# Altium PCB NBP-28 Pin_Swap_Example.PcbDoc (part 2 of 4)
Units mil, origin at the board's own origin, x right, y up, seen from the top; angles counter-clockwise.
Board outline 2716.54 x 4967.15 mil, 10 copper layers (Top Layer, Mid-Layer 1, VCC1V2, Mid-Layer 2, VCC, GND, MidLayer4, VCCINT, Mid-Layer 3, Bottom Layer), stack 81 mil thick; 254 components, 445 nets, 1667 pads, 770 vias.
Unrouted connection lines stored in the file: 611.
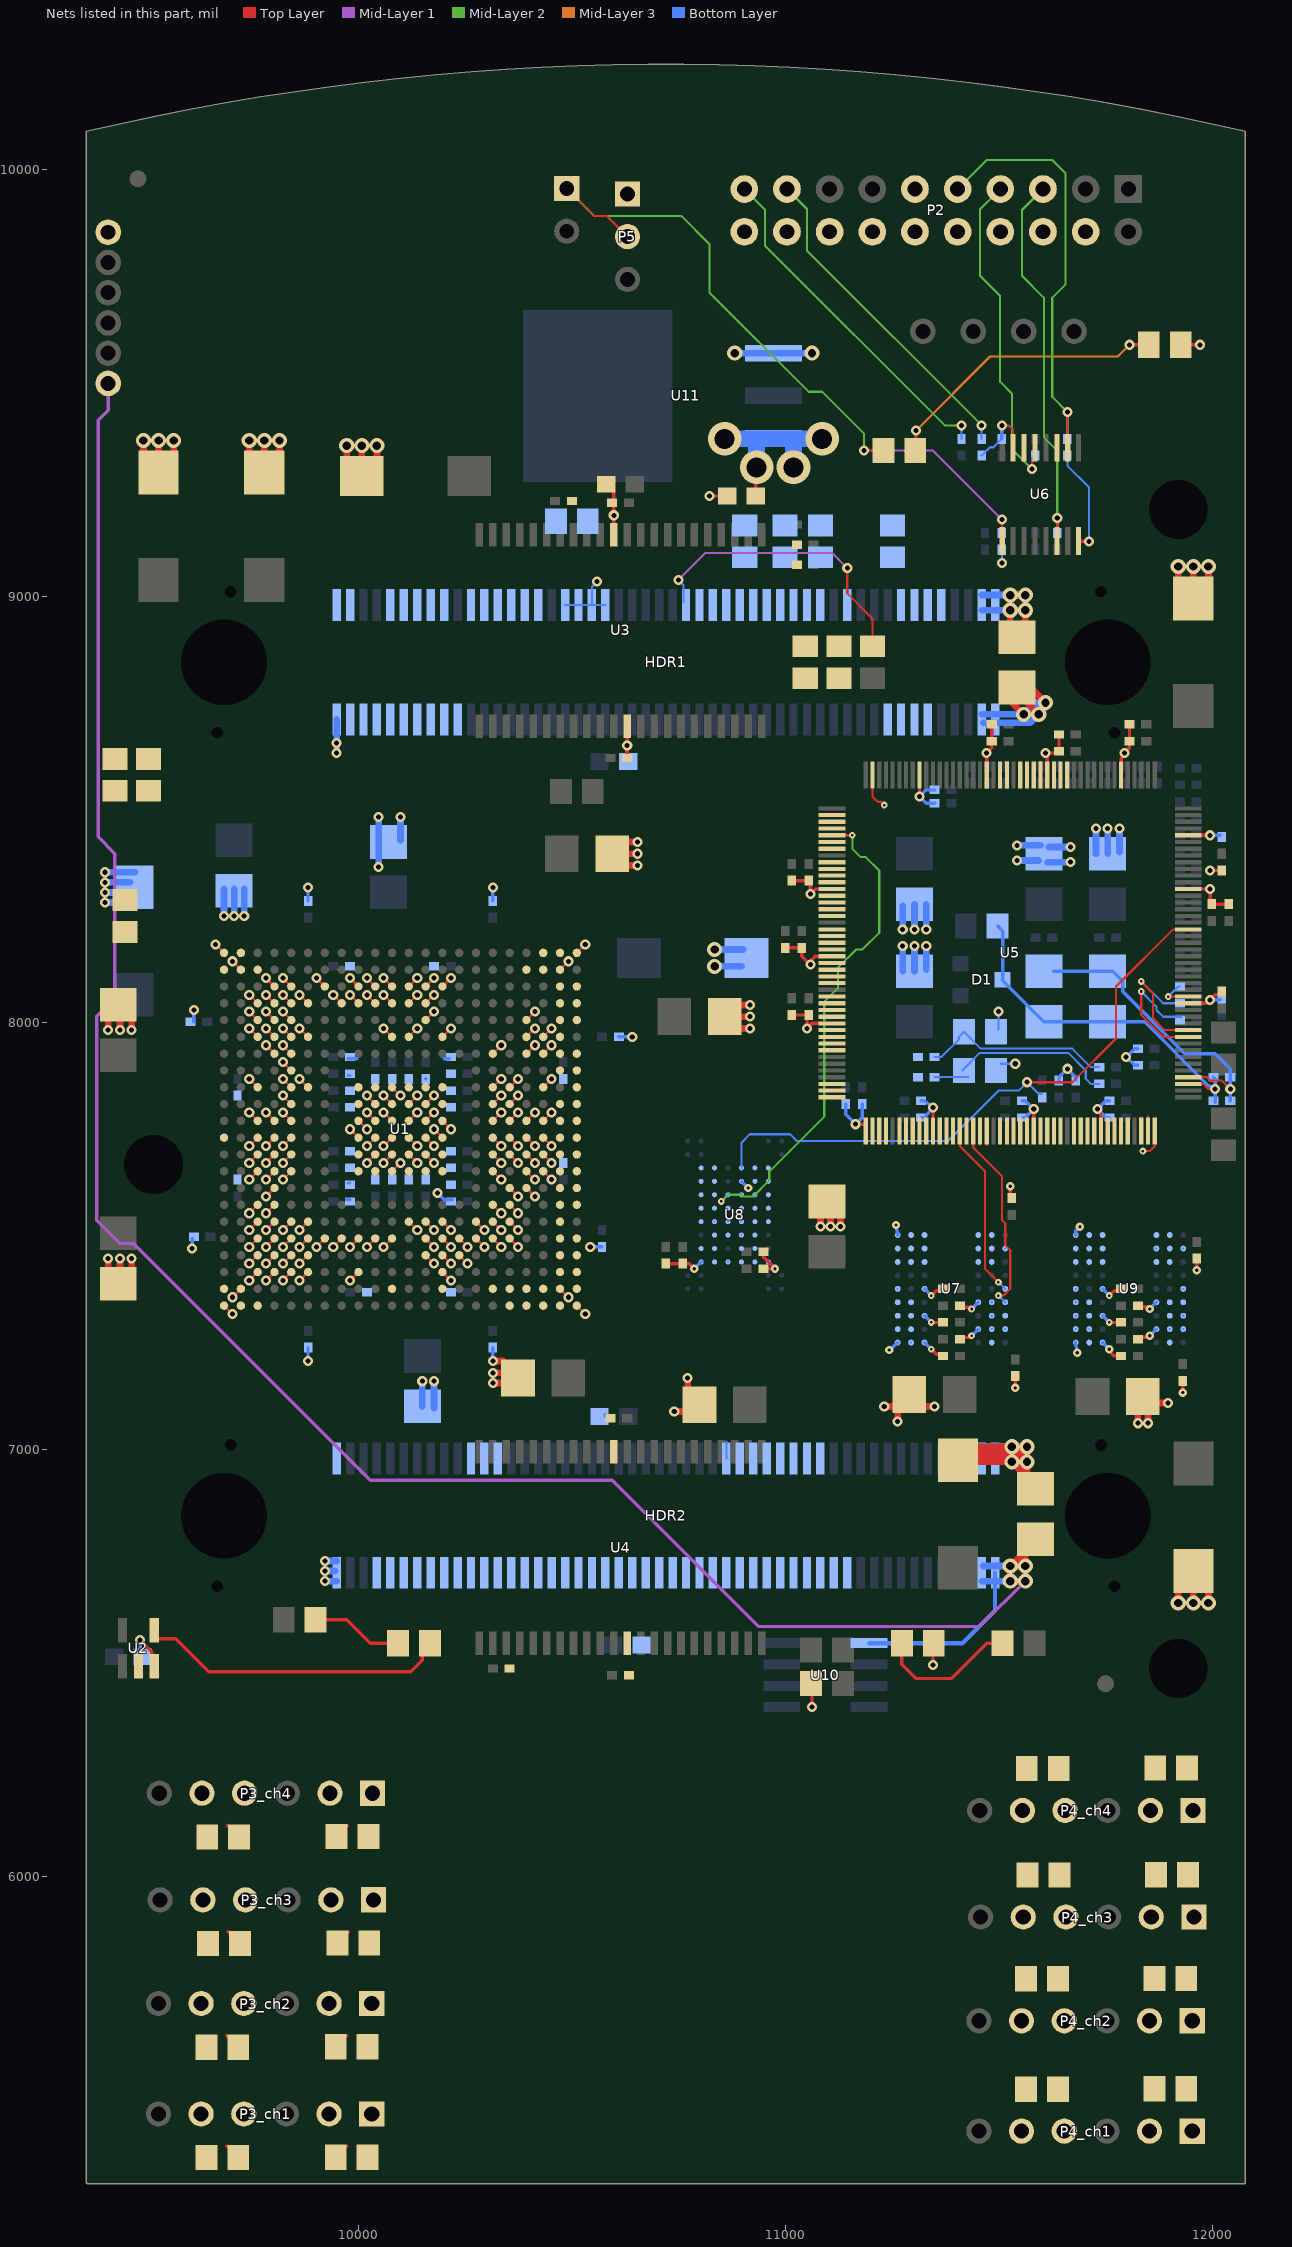
[diagram p9: the nets of this part, all layers, seen from the top]

## Part data
C1: library part CAP-NP-220nF-10V-0603, "Capacitor", Design Item Id=CAP-NP-220nF-10V-0603
C2 C3 C16 C17 C30 C31 C32: library part CAP-P-10uF-16V-MCCT-B, "Polar Capacitor", Design Item Id=CAP-P-10uF-16V-MCCT-B
C4 C5 C12 C13 C14 C15 C18 C19 C20 C21 C33 C34 C35 C36 C41 C42: library part CAP-NP-0.1uF-16V-0402, "Capacitor", Design Item Id=CAP-NP-0.1uF-16V-0402
C6 C7 C8 C9 C10 C11 C22 C23 C24 C25 C26 C27 C28 C29 C37 C38 C39 C40 C43 C44 C45 C46 C47 C48: library part CAP-NP-10nF-16V-0402, "Capacitor", Design Item Id=CAP-NP-10nF-16V-0402
C49 C50 C64 C65 C66 C67 C88 C89 C102 C110 C111 C123 C125 C126 C127 C128 C129 C130 C131 C132 C133: "Polar Capacitor"
  C49 C50 C64 C65 C66 C67 C88 C89 C102 C110 C111 C123 C125: Design Item Id=CAP-P-10uF-16V-MCCT-B
  C126 C127 C128 C129 C130 C131 C132 C133: Design Item Id=CAP-P-220uF-4V-MCCT-D
C51 C52 C53 C54 C55 C56 C57 C58 C59 C60 C61 C62 C63 C68 C69 C70 C71 C72 C73 C74 C75 C76 C77 C78 C79 C80 C81 C82 C83 C84 C85 C86 C87 C90 C91 C92 C93 C94 C95 C96 C97 C98 C99 C100 C101 C103 C104 C105 C106 C107 C108 C109 C112 C113 C114 C115 C116 C117 C118 C119 C120 C121 C122 C124: "Capacitor"
  C51 C52 C55 C56 C124: Design Item Id=CAP-NP-220nF-10V-0603
  C53 C54 C57 C58 C61 C78 C79 C80 C81 C82 C83 C84 C85 C86 C87 C96 C97 C98 C99 C100 C101 C104 C105 C106 C107 C108 C109 C114 C115 C116 C117 C119 C120 C121: Design Item Id=CAP-NP-10nF-16V-0402
  C59 C60 C62 C63 C68 C69 C70 C71 C72 C73 C74 C75 C76 C77 C90 C91 C92 C93 C94 C95 C103 C112 C113 C118 C122: Design Item Id=CAP-NP-0.1uF-16V-0402
D1: "Schottky Barrier Double Diode", Design Item Id=DIO-SCHOTTKY-1S-SOT23
HDR1 HDR2: library part CON-DOCKSTAT-M-0.8mm, "Board-to-Board, Docking Station, 0.80mm (.031\") Pitch, Shielded Receptacle, Vertical, Ultra Low Profile, SMT", Design Item Id=CON-DOCKSTAT-M-0.8mm
LED1: library part LED-RED-HSMHC170, "Typical GREEN SMD LED Agilent make", Design Item Id=LED-RED-HSMHC170
LED2: library part LED-GRN-HSMHC170, "Typical GREEN SMD LED Agilent make", Design Item Id=LED-GRN-HSMHC170
LED3: "Typical GREEN SMD LED Agilent make", Design Item Id=LED-RED-HSMHC170
P1: "Header, 2-Pin", Design Item Id=CON-HDRSTR-2x1-2.54mm
P2: "10x2 IDC Male PCB Box Header", Design Item Id=CON-IDCHDRSTRBOX-M-20
P3_ch1 P3_ch2 P3_ch3 P3_ch4 P4_ch1 P4_ch2 P4_ch3 P4_ch4: "Header, 6-Pin", LatestRevisionDate=17-Jul-2002, LatestRevisionNote="Re-released for DXP Platform.", Publisher="Altium Limited"
P5: "Header, 3-Pin", LatestRevisionDate=17-Jul-2002, LatestRevisionNote="Re-released for DXP Platform.", Publisher="Altium Limited"
R1 R15 R17 R18 R19: library part RES-4K7-0402, "Resistor", Design Item Id=RES-4K7-0402
R2 R3 R4 R6 R7 R8 R9 R10 R11 R12 R13 R14 R16: library part RES-100R-0805, "Resistor", Design Item Id=RES-100R-0805
R5: library part RES-270R-1%-0805, "Resistor", Design Item Id=RES-270R-1%-0805
R20 R21 R22 R23 R24 R25 R26 R27 R28 R29 R30 R31 R32 R33 R34 R35 R36 R37 R38 R39 R40 R41 R42 R43 R44 R45 R46 R47 R48 R49 R50 R51 R52 R53 R54 R55 R56 R57 R58 R59 R60 R61 R62 R63 R64 R65 R66 R67 R68_ch1 R68_ch2 R68_ch3 R68_ch4 R69_ch1 R69_ch2 R69_ch3 R69_ch4 R70_ch1 R70_ch2 R70_ch3 R70_ch4 R71_ch1 R71_ch2 R71_ch3 R71_ch4: "Resistor"
  R20 R21 R22 R23 R24 R25 R26 R27 R28 R29 R30 R31 R32 R33 R34 R35 R36 R39 R40 R41 R42 R43 R44 R45 R48 R49 R50 R51 R52 R53 R54 R55 R56 R57 R60 R61 R62 R63 R66 R67: Design Item Id=RES-4K7-0402
  R37 R46 R58 R64 R65 R68_ch1 R68_ch2 R68_ch3 R68_ch4 R69_ch1 R69_ch2 R69_ch3 R69_ch4 R70_ch1 R70_ch2 R70_ch3 R70_ch4 R71_ch1 R71_ch2 R71_ch3 R71_ch4: Design Item Id=RES-270R-1%-0805
  R38 R47: Design Item Id=RES-10M-0805
  R59: Design Item Id=RES-100R-0805
TP1 TP2: library part TestPin, Design Item Id=TestPin
U1: "Spartan-3 1.2V FPGA, 333 User I/Os, 456-ball FBGA, Standard Performance, Commercial Grade", Design Item Id=XC3S1000-4FG456C
U3 U4: "256Kx16Bit SRAM TSOP44", Design Item Id=MEM-SRAM-256Kx16-TSOP44
U5: "32-Bit ARM720T-Based BlueStreak MCU with 8KB Cache, MMU, Color LCD controller, 32KB SRAM, 176-Pin LQFP", Design Item Id=LH79520N0M000
U6: "Quad 2-Input Multiplexer", Design Item Id=74LCX157-TSOP16
U7 U9: "256Mb Synchronous High-Speed CMOS DRAM, 16Mb x 16Bit x 4 Banks, 54-Ball FPGA, Commercial", Design Item Id=MEM-SDRAM-16Mx16-BGA54
U8: "64 Mb (4 M x 16) CMOS 3.0 Volt, Uniform Sector Flash Memory with VersatileI/O Control, 63-ball FBGA, Industrial Grade", Design Item Id=MEM-FLASH-P-4Mx16-BGA63
U10: "Low Current 3-Terminal Adjustable Positive Voltage Regulator", Design Item Id=VRG-100mA-1.2V-37V-4%-75102
U11: "5A Low Dropout Positive Regulators", Design Item Id=LM1084IS-ADJ
TP3 TP4 TP5 TP6 TP7 TP8 TP9 TP10: Design Item Id=TestPin
U2: Design Item Id=SN74LVC1G04DBV

## Free pads (board coordinates)
  round 39.37 smd paste-39.37 mask+78.74: FID(9482.69,9978.67) FID(11750.41,6451.11)
  round 39.37 smd far side paste-39.37 mask+78.74: FID(9482.69,9978.67) FID(11750.41,6451.11)
  round 125.98 hole 137.8 unplated mask+3.94: LP(9519.16,7668.29) LP(11920.74,6487.18) LP(11920.74,9203.72)

## Via types
v1: diameter 23.62, hole 11.81, Top Layer to Bottom Layer, 495 vias
v2: diameter 78.74, hole 47.24, Top Layer to Bottom Layer, 101 vias
v3: diameter 15.75, hole 5.91, Top Layer to Bottom Layer, 92 vias
v4: diameter 35.43, hole 19.68, Top Layer to Bottom Layer, 59 vias
v5: diameter 19.68, hole 7.87, Top Layer to Bottom Layer, 23 vias

## Nets (pads, with @x,y where several pads share a name; then routed paths per layer and width w, separated by ;. In a path a pad name is that pad's centre, name@x,y a point inside that pad or via, vN(x,y) a via of type N, cw(c..) or ccw(c..) an arc to the next point about the centre after c; other vN are vias at no path point)
+5V: C123.1 C124.1 C125.1 HDR1.97 HDR1.99 HDR2.97 HDR2.99 TP8.1 U10.1 U11.3 | length 6499.5
  Top Layer w7.87: C124.1@10930.58,9235.22 v2@10930.58,9300.18
  Top Layer w15.75: C123.1@11530.97,8750.96 v4(11558.53,8723.41) ; C123.1@11546.72,8790.33 11546.72,8770.65 v4(11593.96,8723.41) ; C123.1@11558.53,8794.27 11566.41,8794.27 v4(11609.71,8750.96) ; C125.1@11562.47,6786.4 C125.1@11562.47,6762.78 ; v4(11527.04,6727.34) v4(11562.47,6727.34) ; v4(11527.04,6727.34) v4(11527.04,6691.91) v4(11562.47,6691.91) v4(11562.47,6727.34) ; v4(11527.04,6727.34) C125.1@11562.47,6762.78 ; v4(11562.47,6727.34) C125.1@11562.47,6762.78
  Mid-Layer 1 w7.87: TP8.1@9412.86,9499 9412.86,9436 9389.24,9412.38 9389.24,8436 9428.61,8396.63 9428.61,8058.05 9386.36,8015.81 9386.36,7537.3 9440.42,7483.25 9471.92,7483.25 10027.04,6928.13 10593.96,6928.13 10936.48,6585.61 11456.17,6585.61 v4(11562.47,6691.91)
  Bottom Layer w10: U10.1@11196.33,6546.44 11415,6546.44 11491.6,6623.04 11491.6,6691.91 HDR2.99@11491.6,6711.59
  Bottom Layer w15.75: HDR2.97@11460.11,6691.91 11491.6,6691.91 v4(11527.04,6691.91) v4(11562.47,6691.91) ; HDR1.97@11460.11,8723.41 v4(11558.53,8723.41) ; HDR2.97@11464.04,6727.34 v4(11527.04,6727.34) v4(11562.47,6727.34) ; HDR1.97@11464.04,8703.72 11574.28,8703.72 v4(11593.96,8723.41) ; v4@11586.09,8735.22 v4@11601.84,8750.96 ; v4(11558.53,8723.41) v4(11593.96,8723.41) ; v4(11558.53,8723.41) 11586.09,8750.96 v4@11601.84,8750.96 ; v4(11593.96,8723.41) 11609.71,8739.15 v4(11609.71,8750.96) v4@11601.84,8750.96
  Bottom Layer w39.37: v2(10857.74,9369.07) U11.3@10932.55,9369.07 ; v2(10932.55,9302.15) U11.3@10932.55,9369.07 ; v2(11019.16,9302.15) U11.3@11019.16,9369.07 ; v2(11086.09,9369.07) U11.3@11019.16,9369.07 ; U11.3@10932.55,9369.07 U11.3@11019.16,9369.07
A0: U1.F19 U5.32 U7.H7 U9.H7 | length 30
  Top Layer w5: U1.F19@10393.18,7967.5 v1(10412.86,7987.19)
  Bottom Layer w5: U9.H7@11867.43,7471.44 U9.H7@11869.56,7471.44
A1: U1.R18 U5.31 U7.H8 U8.G2 U9.H8 | length 27.8
  Top Layer w5: U1.R18@10353.81,7613.17 v1(10373.49,7593.48)
A2: U1.T22 U5.30 U7.J8 U8.F2 U9.J8
A3: U1.R21 U5.29 U7.J7 U8.E2 U9.J7
A4: U1.M22 U5.27 U7.J3 U8.C2 U9.J3
A5: U1.N21 U5.26 U7.J2 U8.D2 U9.J2
A6: U1.L17 U5.25 U7.H3 U8.F3 U9.H3 | length 27.8
  Top Layer w5: U1.L17@10314.44,7770.65 v1(10334.12,7790.34)
A7: U1.N22 U5.24 U7.H2 U8.E3 U9.H2
A8: U1.J17 U5.22 U7.H1 U8.C3 U9.H1 | length 27.8
  Top Layer w5: U1.J17@10314.44,7849.39 v1(10334.12,7869.08)
A9: U1.K17 U5.21 U7.G3 U8.D6 U9.G3 | length 27.8
  Top Layer w5: U1.K17@10314.44,7810.02 v1(10334.12,7829.71)
A10: U1.P21 U5.20 U7.H9 U8.C6 U9.H9 | length 0
A11: U1.P17 U5.19 U7.G2 U8.E6 U9.G2 | length 27.8
  Top Layer w5: U1.P17@10314.44,7652.54 v1(10334.12,7632.85)
A12: U1.T17 U5.17 U7.G1 U8.F6 U9.G1 | length 27.8
  Top Layer w5: U1.T17@10314.44,7573.8 v1(10334.12,7554.11)
A13: U1.N17 U5.16 U7.G7 U8.D7 U9.G7 | length 27.8
  Top Layer w5: U1.N17@10314.44,7691.91 v1(10334.12,7672.22)
A14: U1.M17 U5.15 U7.G8 U8.C7 U9.G8 | length 27.8
  Top Layer w5: U1.M17@10314.44,7731.28 v1(10334.12,7711.59)
A15: U1.T18 U5.14 U8.E7 | length 27.8
  Top Layer w5: U1.T18@10353.81,7573.8 v1(10373.49,7554.11)
A16: U1.U18 U5.12 U8.F7 | length 27.8
  Top Layer w5: U1.U18@10353.81,7534.43 v1(10373.49,7514.74)
A17: U1.U17 U5.11 U8.G7 | length 27.8
  Top Layer w5: U1.U17@10314.44,7534.43 v1(10334.12,7514.74)
A18: U1.P22 U5.10 U8.D3
A19: U1.R22 U5.9 U8.E4
A20: U1.T21 U5.7 U8.F5
A21: U1.G17 U5.6 U8.F4 | length 27.8
  Top Layer w5: U1.G17@10314.44,7928.13 v1(10334.12,7947.82)
A22: U1.F21 U5.5 U8.E5 | length 1162.9
  Top Layer w5: U5.5@11109.71,8439.94 v3(11156.96,8439.94)
  Mid-Layer 2 w5: v3(10849.87,7581.67) 10865.62,7597.42 10897.11,7597.42 10901.05,7593.48 10924.67,7593.48 10962.23,7631.04 10962.23,7651.45 11091.21,7780.43 11091.21,8049.6 11123.02,8081.41 11123.02,8129.48 11165.76,8172.22 11180.58,8172.22 11219.95,8211.59 11219.95,8357.26 11188.45,8388.76 11176.64,8388.76 11156.96,8408.44 v3(11156.96,8439.94)
  Bottom Layer w5: v3(10849.87,7581.67) U8.E5@10865.62,7597.42
A23: U1.E22 U5.4
A24: U1.E21 U5.3
A25: U1.D22 U5.2
AUDIO_SPI_CSN: HDR1.11 U1.C11 | length 27.8
  Top Layer w5: v1(10058.53,8105.3) U1.C11@10078.22,8085.61
BLUE0: HDR1.14 U1.D5 | length 27.8
  Top Layer w5: v1(9822.31,8065.93) U1.D5@9842,8046.24
BLUE1: HDR1.16 U1.C4 | length 27.8
  Top Layer w5: v1(9782.94,8105.3) U1.C4@9802.63,8085.61
BOC_CTS: HDR1.13 U1.D12 | length 27.8
  Top Layer w5: U1.D12@10117.59,8046.24 v1(10137.27,8065.93)
BOC_RTS: HDR1.17 U1.C13 | length 27.8
  Top Layer w5: U1.C13@10156.96,8085.61 v1(10176.64,8105.3)
BOC_RX: HDR1.19 U1.D13 | length 27.8
  Top Layer w5: U1.D13@10156.96,8046.24 v1(10176.64,8065.93)
BOC_TX: HDR1.15 U1.E13 | length 27.8
  Top Layer w5: U1.E13@10156.96,8006.87 v1(10176.64,8026.56)
BUZZER: HDR2.24 U1.W14 | length 27.8
  Top Layer w5: U1.W14@10196.33,7455.69 v1(10216.01,7436)
CAN_RXD: HDR1.4 U1.C7 | length 27.8
  Top Layer w5: v1(9901.05,8105.3) U1.C7@9920.74,8085.61
CAN_TXD: HDR1.2 U1.D8 | length 27.8
  Top Layer w5: v1(9940.42,8065.93) U1.D8@9960.11,8046.24
CLK_RTC: R44.2 U1.G19 | length 27.8
  Top Layer w5: U1.G19@10393.18,7928.13 v1(10412.86,7947.82)
CLKIN: R36.2 U1.G20 | length 27.8
  Top Layer w5: U1.G20@10432.55,7928.13 v1(10452.23,7947.82)
CLKOUT: U1.C12 U5.156 | length 27.8
  Top Layer w5: U1.C12@10117.59,8085.61 v1(10137.27,8105.3)
D0: U1.AA17 U5.87 U8.G3 U9.A8 | length 33.1
  Top Layer w5: U5.87@11849.87,7747.03 11849.87,7780.13
D1: U1.Y21 U5.86 U8.K3 U9.B9 | length 31.5
  Top Layer w5: U5.86@11834.12,7747.03 U5.86@11834.12,7778.52
D2: U1.U21 U5.84 U8.G4 U9.B8 | length 0
D3: U1.Y22 U5.83 U8.K4 U9.C9 | length 0
D4: U1.W21 U5.82 U8.K5 U9.C8 | length 0
D5: U1.U16 U5.81 U8.G5 U9.D9 | length 27.8
  Top Layer w5: U1.U16@10275.07,7534.43 v1(10294.75,7514.74)
D6: U1.W22 U5.79 U8.K6 U9.D8
D7: U1.V21 U5.78 U8.G6 U9.E9 | length 0
D8: U1.V18 U5.77 U8.H3 U9.E1 | length 27.8
  Top Layer w5: U1.V18@10353.81,7495.06 v1(10373.49,7475.37)
D9: U1.AA20 U5.76 U8.J3 U9.D2
D10: U1.V22 U5.74 U8.H4 U9.D1 | length 0
D11: U1.AB20 U5.73 U8.J4 U9.C2
D12: U1.AB18 U5.72 U8.H5 U9.C1 | length 0
D13: U1.AA19 U5.71 U8.J6 U9.B2 | length 0
D14: U1.AA18 U5.69 U8.H6 U9.B1 | length 0
D15: U1.AB19 U5.68 U8.J7 U9.A2
D16: U1.V7 U5.67 U7.A8 | length 27.8
  Top Layer w5: v1(9901.05,7475.37) U1.V7@9920.74,7495.06
D17: U1.V9 U5.66 U7.B9 | length 27.8
  Top Layer w5: v1(9979.79,7475.37) U1.V9@9999.48,7495.06
D18: U1.V10 U5.65 U7.B8 | length 27.8
  Top Layer w5: v1(10019.16,7475.37) U1.V10@10038.85,7495.06
D19: U1.V6 U5.63 U7.C9 | length 60.9
  Top Layer w5: v1(9861.68,7475.37) U1.V6@9881.37,7495.06 ; 11471.92,7713.93 U5.63@11471.92,7747.03
D20: U1.V11 U5.62 U7.C8 | length 59.3
  Top Layer w5: v1(10058.53,7475.37) U1.V11@10078.22,7495.06 ; 11456.17,7715.53 U5.62@11456.17,7747.03
D21: U1.U6 U5.61 U7.D9 | length 490.1
  Top Layer w5: v1(9861.68,7514.74) U1.U6@9881.37,7534.43 ; U5.61@11440.42,7747.03 11440.42,7708.38 11507.35,7641.45 11507.35,7538.37 11515.22,7530.49 11515.22,7479.31 11527.04,7467.5 11527.04,7376.95 11511.29,7361.2 v3(11499.48,7361.2)
  Bottom Layer w5: v3(11499.48,7361.2) U7.D9@11515.22,7345.45
D22: U1.V8 U5.60 U7.D8 | length 27.8
  Top Layer w5: v1(9940.42,7475.37) U1.V8@9960.11,7495.06
D23: U1.V5 U5.59 U7.E9 | length 441.9
  Top Layer w5: v1(9822.31,7475.37) U1.V5@9842,7495.06 ; U5.59@11408.93,7747.03 11408.93,7711.59 11467.98,7652.54 11467.98,7424.19 v3(11499.48,7392.7)
  Bottom Layer w5: v3(11499.48,7392.7) U7.E9@11515.22,7376.95
D24: U1.U13 U5.58 U7.E1 | length 27.8
  Top Layer w5: U1.U13@10156.96,7534.43 v1(10176.64,7514.74)
D25: U1.U14 U5.57 U7.D2 | length 27.8
  Top Layer w5: U1.U14@10196.33,7534.43 v1(10216.01,7514.74)
D26: U1.V17 U5.56 U7.D1 | length 27.8
  Top Layer w5: U1.V17@10314.44,7495.06 v1(10334.12,7475.37)
D27: U1.V16 U5.54 U7.C2 | length 27.8
  Top Layer w5: U1.V16@10275.07,7495.06 v1(10294.75,7475.37)
D28: U1.V15 U5.53 U7.C1 | length 27.8
  Top Layer w5: U1.V15@10235.7,7495.06 v1(10255.38,7475.37)
D29: U1.V14 U5.52 U7.B2 | length 27.8
  Top Layer w5: U1.V14@10196.33,7495.06 v1(10216.01,7475.37)
D30: U1.V13 U5.51 U7.B1 | length 31.1
  Top Layer w5: U1.V13@10156.96,7495.06 v1(10176.64,7475.37) ; U5.51@11280.64,7744.72 U5.51@11282.94,7747.03
D31: U1.U12 U5.50 U7.A2 | length 27.8
  Top Layer w5: U1.U12@10117.59,7534.43 v1(10137.27,7514.74)
DEBUG_TCK: P2.9 R63.2 U6.10 | length 1026.9
  Top Layer w5: U6.10@11660.89,9349.39 v1(11660.89,9432.07)
  Mid-Layer 2 w5: P2.9@11403.81,9954.51 11471.92,10022.62 11625.46,10022.62 11656.96,9991.12 11656.96,9731.28 11625.46,9699.78 11625.46,9467.5 v1(11660.89,9432.07)
  Bottom Layer w5: R63.2@11660.89,9369.07 v1(11660.89,9432.07)
DEBUG_TDI: P2.5 R61.2 U6.6 | length 915.7
  Top Layer w5: U6.6@11637.27,9128.92 v1(11637.27,9184.04)
  Mid-Layer 2 w5: P2.5@11603.81,9954.51 11554.59,9905.3 11554.59,9750.96 11605.78,9699.78 11605.78,9373.01 11637.27,9341.52 v1(11637.27,9184.04)
  Bottom Layer w5: R61.2@11637.27,9148.6 v1(11637.27,9184.04)
DEBUG_TMS: P2.7 R62.2 U6.13 | length 768.8
  Top Layer w5: v1(11578.22,9298.21) 11578.22,9313.96 U6.13@11586.09,9321.83
  Mid-Layer 2 w5: P2.7@11495.18,9945.88 11456.17,9906.87 11456.17,9750.96 11503.41,9703.72 11503.41,9502.93 11530.97,9475.37 11530.97,9345.45 v1(11578.22,9298.21)
  Bottom Layer w5: v1(11578.22,9298.21) R62.2@11578.22,9325.77
DEOT0: U1.L18 U5.148 | length 27.8
  Top Layer w5: U1.L18@10353.81,7770.65 v1(10373.49,7790.34)
DIFF_RX_ch1_N: P3_ch1.5 P4_ch1.1 R69_ch1.2 R71_ch1.1
DIFF_RX_ch1_P: P3_ch1.4 P4_ch1.2 R69_ch1.1 R71_ch1.2 | length 38.7
  Top Layer w7.87: 9690.46,5368.14 R71_ch1.2@9717.86,5340.74
DIFF_RX_ch2_N: P3_ch2.5 P4_ch2.1 R69_ch2.2 R71_ch2.1
DIFF_RX_ch2_P: P3_ch2.4 P4_ch2.2 R69_ch2.1 R71_ch2.2 | length 38.7
  Top Layer w7.87: 9690.46,5626.94 R71_ch2.2@9717.86,5599.54
DIFF_RX_ch3_N: P3_ch3.5 P4_ch3.1 R69_ch3.2 R71_ch3.1
DIFF_RX_ch3_P: P3_ch3.4 P4_ch3.2 R69_ch3.1 R71_ch3.2 | length 38.7
  Top Layer w7.87: 9694.39,5869.98 R71_ch3.2@9721.79,5842.58
DIFF_RX_ch4_N: P3_ch4.5 P4_ch4.1 R69_ch4.2 R71_ch4.1
DIFF_RX_ch4_P: P3_ch4.4 P4_ch4.2 R69_ch4.1 R71_ch4.2 | length 38.7
  Top Layer w7.87: 9692.43,6119.92 R71_ch4.2@9719.83,6092.52
DIFF_TX_ch1_N: P3_ch1.2 P4_ch1.5 R68_ch1.1 R70_ch1.1 | length 36.3
  Top Layer w7.87: R70_ch1.1@9946.13,5341.73 9971.82,5367.42
DIFF_TX_ch1_P: P3_ch1.1 P4_ch1.4 R68_ch1.2 R70_ch1.2
DIFF_TX_ch2_N: P3_ch2.2 P4_ch2.5 R68_ch2.1 R70_ch2.1 | length 36.3
  Top Layer w7.87: R70_ch2.1@9946.13,5600.52 9971.82,5626.22
DIFF_TX_ch2_P: P3_ch2.1 P4_ch2.4 R68_ch2.2 R70_ch2.2
DIFF_TX_ch3_N: P3_ch3.2 P4_ch3.5 R68_ch3.1 R70_ch3.1 | length 36.3
  Top Layer w7.87: R70_ch3.1@9950.06,5843.57 9975.76,5869.26
DIFF_TX_ch3_P: P3_ch3.1 P4_ch3.4 R68_ch3.2 R70_ch3.2
DIFF_TX_ch4_N: P3_ch4.2 P4_ch4.5 R68_ch4.1 R70_ch4.1 | length 36.3
  Top Layer w7.87: R70_ch4.1@9948.09,6093.5 9973.79,6119.2
DIFF_TX_ch4_P: P3_ch4.1 P4_ch4.4 R68_ch4.2 R70_ch4.2
DREQ0: U1.M18 U5.146 | length 27.8
  Top Layer w5: U1.M18@10353.81,7731.28 v1(10373.49,7711.59)
FLASH_BUSY: R20.1 U5.114 U8.C4 | length 1444.8
  Top Layer w5: v1(11566.41,7861.2) 11672.7,7861.2 11775.07,7963.56 11775.07,8085.61 11908.93,8219.47 U5.114@11944.36,8219.47
  Bottom Layer w5: U8.C4@10897.11,7660.41 10897.11,7719.47 10916.8,7739.15 11011.29,7739.15 11027.04,7723.41 11381.37,7723.41 11499.48,7841.52 11546.72,7841.52 v1(11566.41,7861.2) 11593.96,7833.64 R20.1@11601.84,7833.64
FPGA_AUX0: R14.1 U1.B3
FPGA_AUX0_R: HDR1.86 R14.2
FPGA_AUX1: HDR1.88 U1.F12 | length 27.8
  Top Layer w5: U1.F12@10117.59,7967.5 v1(10137.27,7987.19)
FPGA_AUX2: HDR1.90 U1.F14 | length 27.8
  Top Layer w5: U1.F14@10196.33,7967.5 v1(10216.01,7987.19)
FPGA_AUX3: HDR1.92 U1.F11 | length 27.8
  Top Layer w5: v1(10058.53,7987.19) U1.F11@10078.22,7967.5
FPGA_CCLK: R3.2 U1.AA22
FPGA_CCLK_R: HDR1.66 R3.1
FPGA_CLK: HDR2.2 U1.AA11
FPGA_CLK_1: HDR1.30 U1.F3 | length 27.8
  Top Layer w5: v1(9743.57,7987.19) U1.F3@9763.26,7967.5
FPGA_CLK_2: HDR1.32 U1.G4 | length 27.8
  Top Layer w5: v1(9782.94,7947.82) U1.G4@9802.63,7928.13
FPGA_DIN: HDR1.64 U1.AA14
FPGA_DONE: R4.2 R15.1 U1.AB21 U2.2
FPGA_DONE_R: HDR1.74 R4.1
FPGA_INIT: HDR1.68 R18.1 R19.1
FPGA_M0: R8.2 U1.AB2
FPGA_M0_R: HDR1.60 R8.1
FPGA_M1: R9.2 U1.AA1
FPGA_M1_R: HDR1.58 R9.1
FPGA_M2: R10.2 U1.AB3
FPGA_M2_R: HDR1.56 R10.1
FPGA_PROGRAM_R: HDR1.62 R7.1 R17.1
FPGA_PROGRAMP: R7.2 U1.A2
FPGA_TCK: HDR1.72 R12.1 U6.11
FPGA_TCKP: R12.2 U1.A21
FPGA_TDI: HDR1.78 R11.1
FPGA_TDIP: R11.2 U1.B1
FPGA_TDO: HDR1.54 R6.2 | length 702.1
  Top Layer w5: v1(11145.15,9065.92) 11145.15,9006.87 11204.2,8947.81 R6.2@11204.2,8882.85
  Mid-Layer 1 w5: v1(10749.3,9038.31) 10812.34,9101.36 11109.71,9101.36 v1(11145.15,9065.92)
  Bottom Layer w5: v1(10749.3,9038.31) 10761.3,9026.31 HDR1.54@10761.3,8985.31
FPGA_TMS: HDR1.70 R13.1 U6.14
FPGA_TMSP: R13.2 U1.A20
GND: C1.1 C2.2 C3.2 C4.2 C5.2 C6.2 C7.2 C8.2 C9.2 C10.2 C11.2 C12.2 C13.2 C14.2 C15.2 C16.2 C17.2 C18.2 C19.2 C20.2 C21.2 C22.2 C23.2 C24.2 C25.2 C26.2 C27.2 C28.2 C29.2 C30.2 C31.2 C32.2 C33.2 C34.2 C35.2 C36.2 C37.2 C38.2 C39.2 C40.2 C41.2 C42.2 C43.2 C44.2 C45.2 C46.2 C47.2 C48.2 C49.2 C50.2 C51.2 C52.2 C53.2 C54.2 C55.2 C56.2 C57.2 C58.2 C62.2 C66.2 C67.2 C68.2 C69.2 C70.2 C71.2 C72.2 C73.2 C74.2 C75.2 C76.2 C77.2 C78.2 C79.2 C80.2 C81.2 C82.2 C83.2 C84.2 C85.2 C86.2 C87.2 C88.2 C89.2 C90.2 C91.2 C92.2 C93.2 C94.2 C95.2 C96.2 C97.2 C98.2 C99.2 C100.2 C101.2 C102.2 C103.2 C104.2 C105.2 C106.2 C107.2 C108.2 C109.2 C110.2 C111.2 C112.2 C113.2 C114.2 C115.2 C116.2 C117.2 C118.2 C119.2 C120.2 C121.2 C122.2 C123.2 C124.2 C125.2 C126.2 C127.2 C128.2 C129.2 C130.2 C131.2 C132.2 C133.2 HDR1.1 HDR1.36 HDR1.38 HDR1.40 HDR1.42 HDR1.98 HDR1.100 HDR2.1 HDR2.98 HDR2.100 LED1.2 LED3.2 P2.4 P2.6 P2.8 P2.10 P2.11 P2.12 P2.14 P2.16 P2.18 P2.20 P5.1 R37.1 R46.1 R60.2 R63.1 R65.2 R66.1 TP10.1 U1.A1 U1.A22 U1.AA2 U1.AA21 U1.AB1 U1.AB22 U1.B2 U1.B21 U1.C9 U1.C14 U1.J3 U1.J9 U1.J10 U1.J11 U1.J12 U1.J13 U1.J14 U1.J20 U1.K9 U1.K10 U1.K11 U1.K12 U1.K13 U1.K14 U1.L9 U1.L10 U1.L11 U1.L12 U1.L13 U1.L14 U1.M9 U1.M10 U1.M11 U1.M12 U1.M13 U1.M14 U1.N9 U1.N10 U1.N11 U1.N12 U1.N13 U1.N14 U1.P3 U1.P9 U1.P10 U1.P11 U1.P12 U1.P13 U1.P14 U1.P20 U1.Y9 U1.Y14 U2.3 U3.12 U3.34 U4.12 U4.34 U5.13 U5.23 U5.33 U5.45 U5.55 U5.70 U5.80 U5.88 U5.103 U5.120 U5.128 U5.138 U5.149 U5.158 U5.168 U5.175 U6.8 U6.15 U7.A1 U7.A3 U7.B7 U7.C3 U7.D7 U7.E3 U7.J1 U8.D4 U8.K2 U8.K7 U9.A1 U9.A3 U9.B7 U9.C3 U9.D7 U9.E3 U9.J1 U11.1 | length 11663.4
  Top Layer w5: v1(9664.83,8184.04) U1.A1@9684.52,8164.35 ; U1.AB1@9684.52,7337.58 v1(9704.2,7317.89) ; v1(9704.2,7357.26) U1.AA2@9723.89,7376.95 ; v1(9704.2,8144.67) U1.B2@9723.89,8124.98 ; v1(9743.57,7632.85) U1.P3@9763.26,7652.54 ; v1(9743.57,7869.08) U1.J3@9763.26,7849.39 ; v1(9979.79,7396.63) U1.Y9@9999.48,7416.32 ; v1(9979.79,7750.97) U1.M9@9999.48,7731.28 ; v1(9979.79,8105.3) U1.C9@9999.48,8085.61 ; U1.L9@9999.48,7770.65 v1(10019.16,7750.96) ; v1(10019.16,7672.22) U1.N10@10038.85,7691.91 ; v1(10019.16,7711.59) U1.M10@10038.85,7731.28 ; v1(10019.16,7790.34) U1.L10@10038.85,7770.65 ; v1(10019.16,7829.71) U1.K10@10038.85,7810.02 ; v1(10058.53,7672.22) U1.N11@10078.22,7691.91 ; v1(10058.53,7711.59) U1.M11@10078.22,7731.28 ; v1(10058.53,7790.34) U1.L11@10078.22,7770.65 ; v1(10058.53,7829.71) U1.K11@10078.22,7810.02 ; U1.P11@10078.22,7652.54 v1(10097.9,7672.23) ; U1.J11@10078.22,7849.39 v1(10097.9,7829.7) ; U1.N12@10117.59,7691.91 v1(10137.27,7672.22) ; U1.M12@10117.59,7731.28 v1(10137.27,7711.59) ; U1.L12@10117.59,7770.65 v1(10137.27,7790.34) ; U1.K12@10117.59,7810.02 v1(10137.27,7829.71) ; U1.N13@10156.96,7691.91 v1(10176.64,7672.22) ; U1.M13@10156.96,7731.28 v1(10176.64,7711.59) ; U1.L13@10156.96,7770.65 v1(10176.64,7790.34) ; U1.K13@10156.96,7810.02 v1(10176.64,7829.71) ; v1(10176.64,7750.97) U1.M14@10196.33,7731.28 ; U1.Y14@10196.33,7416.32 v1(10216.01,7396.63) ; U1.L14@10196.33,7770.65 v1(10216.01,7750.96) ; U1.C14@10196.33,8085.61 v1(10216.01,8105.3) ; U1.P20@10432.55,7652.54 v1(10452.23,7632.85) ; U1.J20@10432.55,7849.39 v1(10452.23,7869.08) ; U1.AA21@10471.92,7376.95 v1(10491.6,7357.26) ; U1.B21@10471.92,8124.98 v1(10491.6,8144.67) ; U1.AB22@10511.29,7337.58 v1(10530.97,7317.89) ; U1.A22@10511.29,8164.35 v1(10530.97,8184.04) ; U5.175@11204.2,8581.67 11204.2,8530.49 11216.01,8518.68 11223.89,8518.68 v3(11231.76,8510.81) ; v1(11507.35,9400.57) 11523.1,9400.57 11533.93,9389.74 U6.15@11533.93,9348.41 ; v3(11838.06,7699.78) 11853.81,7699.78 11865.62,7711.59 U5.88@11865.62,7747.03
  Top Layer w7.87: v1(9487.67,6554.11) 9515.22,6526.55 U2.3@9515.22,6495.06 ; U3.34@10597.9,9139.74 v1(10597.9,9189.94) 10597.9,9262.78 C51.2@10597.9,9270.65 ; C53.2@10629.4,8621.04 v1(10629.4,8650.57) U3.12@10629.4,8695.85 U3.12@10629.4,8700.77 ; C105.2@10719.95,7436 10775.07,7436 v5(10786.88,7424.19) ; v1(10822.31,9235.22) C124.2@10863.65,9235.22 ; C103.2@10948.3,7424.19 v5(10975.85,7424.19) 10948.3,7451.75 C106.2@10948.3,7463.56 ; C71.2@10999.48,8176.16 C81.2@11038.85,8176.16 11038.85,8156.48 v1(11058.53,8136.79) 11058.53,8144.67 11070.34,8156.48 U5.23@11109.71,8156.48 ; C70.2@11015.22,8018.68 C80.2@11054.59,8018.68 ; C68.2@11015.22,8333.64 C78.2@11054.59,8333.64 ; C80.2@11058.53,8014.74 11054.6,8014.74 11050.66,8014.74 v1(11050.66,7987.18) 11062.47,7999 U5.33@11109.71,7999 ; C78.2@11058.53,8329.7 v1(11058.53,8302.15) 11070.34,8313.96 U5.13@11109.71,8313.96 ; v1(11062.47,6396.63) R65.2@11062.47,6449.78 ; v1(11164.83,7762.78) U5.45@11188.45,7762.78 ; v1(11314.44,8530.49) U5.168@11314.44,8581.67 ; v3(11342,7235.22) 11353.81,7223.41 C120.2@11373.49,7223.41 ; v3(11342,7298.21) C118.2@11369.56,7298.21 ; v3(11342,7361.2) 11353.81,7373.01 C109.2@11373.49,7373.01 ; v1(11345.93,6495.06) LED1.2@11345.93,6544.27 ; U5.55@11345.93,7747.03 v1(11345.93,7802.15) ; C119.2@11404.99,7262.78 11432.55,7262.78 v3(11436.48,7266.71) ; C121.2@11404.99,7333.64 11432.55,7333.64 v3(11436.48,7329.7) ; U5.158@11471.92,8581.67 v1(11471.92,8632.85) 11483.73,8644.67 C95.2@11483.73,8699.78 ; C122.2@11527.04,7593.48 v5(11527.04,7617.11) ; v5(11538.85,7144.67) C108.2@11538.85,7172.22 ; U5.70@11582.15,7747.03 v1(11582.15,7798.21) ; v1(11609.71,8632.85) C86.2@11637.27,8632.85 ; U5.149@11613.65,8581.67 v1@11613.65,8628.92 ; C86.2@11641.21,8636.79 C76.2@11641.21,8676.16 ; U6.8@11688.45,9128.92 v1(11712.08,9128.92) ; v1@11731.76,7794.27 11739.63,7786.4 U5.80@11739.63,7747.03 ; v5@11758.33,7232.28 11770.14,7220.47 C117.2@11789.82,7220.47 ; v3(11759.32,7298.21) C112.2@11786.88,7298.21 ; v3(11759.32,7361.2) 11771.13,7373.01 C107.2@11790.82,7373.01 ; U5.138@11786.88,8581.67 11786.88,8621.04 v1@11794.75,8628.92 ; v1(11794.75,8632.85) 11806.56,8644.67 C94.2@11806.56,8699.78 ; C115.2@11821.32,7263.78 11848.88,7263.78 v5@11852.81,7267.71 ; C116.2@11821.32,7334.64 11848.88,7334.64 v5@11852.82,7330.7 ; LED3.2@11926.64,9589.55 v1(11971.92,9589.55) ; v5(11931.56,7133.85) C114.2@11931.56,7161.41 ; U5.103@11944.36,8046.24 11987.67,8046.24 v1(11995.54,8054.11) 12007.35,8065.93 C84.2@12023.1,8065.93 ; U5.120@11944.36,8313.96 v1(11995.54,8313.96) C101.2@11995.54,8282.46 ; U5.128@11944.36,8439.94 v1(11995.54,8439.94) ; v5(11964.04,7420.26) C113.2@11964.04,7447.81 ; v1(11995.54,8357.26) C75.2@12023.1,8357.26 ; C101.2@11999.48,8278.52 C93.2@12038.85,8278.52
  Top Layer w15.75: C3.2@9404.99,7384.82 9412.86,7388.76 v1(9412.86,7447.81) ; C32.2@9404.99,8046.24 9412.86,8042.3 v1(9412.86,7983.25) ; C3.2@9436.48,7384.82 9440.42,7388.76 v1(9440.42,7447.81) ; C32.2@9436.48,8046.24 9440.42,8042.3 v1(9440.42,7983.25) ; C3.2@9467.98,7384.82 v1(9467.98,7447.81) ; v1(9467.98,7983.25) C32.2@9467.98,8046.24 ; C130.2@9495.54,9294.27 v4(9495.54,9365.14) ; C130.2@9530.97,9290.33 v4(9530.97,9365.14) ; C130.2@9566.41,9286.4 v4(9566.41,9365.14) ; C127.2@9743.57,9302.15 v4(9743.57,9365.14) ; C127.2@9779,9290.33 v4(9779,9365.14) ; C127.2@9814.44,9306.08 v4(9814.44,9365.14) ; C131.2@9971.92,9282.46 v4(9971.92,9353.33) ; C131.2@10007.35,9282.46 v4(10007.35,9353.33) ; C131.2@10042.78,9282.46 v4(10042.78,9353.33) ; v1(10314.44,7156.48) C2.2@10373.49,7156.48 ; v1(10314.44,7180.1) C2.2@10377.43,7180.1 ; v1(10314.44,7207.66) 10338.06,7207.66 C2.2@10357.74,7187.97 ; C49.2@10590.03,8369.07 v1(10653.02,8369.07) ; C49.2@10590.03,8424.19 v1(10653.02,8424.19) ; C49.2@10593.96,8396.63 v1(10653.02,8396.63) ; v1(10739.63,7089.55) C50.2@10802.63,7089.55 ; C50.2@10771.13,7093.48 v1(10771.13,7168.29) ; C31.2@10853.81,7987.18 v1(10916.8,7987.18) ; C31.2@10853.81,8042.3 v1(10916.8,8042.3) ; C31.2@10857.74,8014.74 v1(10916.8,8014.74) ; v1(11082.15,7522.62) C102.2@11082.15,7565.93 ; v1(11105.78,7522.62) C102.2@11105.78,7573.8 ; v1(11129.4,7522.62) C102.2@11129.4,7581.67 ; v1(11231.76,7101.36) C110.2@11263.26,7101.36 ; v1(11263.26,7065.93) C110.2@11263.26,7101.36 ; C110.2@11263.26,7113.17 C110.2@11263.26,7101.36 ; C110.2@11279,7101.36 C110.2@11263.26,7101.36 ; C110.2@11298.69,7101.36 v1(11349.87,7101.36) ; C132.2@11404.99,7006.87 v4(11530.97,7006.87) ; C132.2@11408.93,6971.44 v4(11530.97,6971.44) ; C132.2@11432.55,6995.06 v4@11530.97,6995.06 ; C132.2@11440.42,6983.25 v4@11530.97,6983.25 ; C123.2@11527.04,8896.63 v4(11527.04,8967.5) ; C123.2@11562.47,8896.63 v4(11562.47,8967.5) ; C125.2@11566.41,6912.38 C125.2@11566.41,6936 ; C125.2@11570.34,6932.07 C125.2@11566.41,6936 ; v1(11826.25,7061.99) C111.2@11826.25,7124.98 ; v1(11849.87,7061.99) C111.2@11849.87,7117.11 ; C111.2@11853.81,7109.23 v1(11897.11,7109.23) ; v4(11920.74,6640.73) C126.2@11920.74,6703.72 ; C133.2@11920.74,9006.87 v4(11920.74,9069.86) ; v4(11956.17,6640.73) C126.2@11956.17,6707.66 ; C133.2@11956.17,8995.06 v4(11956.17,9069.86) ; v4(11991.6,6640.73) C126.2@11991.6,6691.91 ; C133.2@11991.6,8991.12 v4(11991.6,9069.86) ; v4(11527.04,8967.5) v4(11562.47,8967.5) ; v4(11527.04,8967.5) v4(11527.04,9002.93) v4(11562.47,9002.93) v4(11562.47,8967.5) ; v4(11530.97,6971.44) v4(11566.41,6971.44) ; v4(11530.97,6971.44) v4@11530.97,6983.25 ; v4(11530.97,6971.44) C125.2@11566.41,6936 ; v4@11530.97,6983.25 v4@11530.97,6995.06 ; v4@11530.97,6983.25 11554.59,6983.25 v4(11566.41,6971.44) ; v4@11530.97,6995.06 v4(11530.97,7006.87) ; v4@11530.97,6995.06 11554.59,6995.06 v4(11566.41,7006.87) ; v4(11530.97,7006.87) v4(11566.41,7006.87) ; C125.2@11566.41,6936 v4(11566.41,6971.44) ; v4(11566.41,6971.44) v4(11566.41,7006.87)
  Bottom Layer w5: HDR1.36@10483.73,8979.31 HDR1.38@10515.22,8979.31 HDR1.40@10546.72,8979.31 ; v1(10558.53,9034.43) 10546.72,9022.62 HDR1.40@10546.72,8979.31 ; HDR1.42@10578.22,8979.31 HDR1.40@10546.72,8979.31 ; R66.1@11460.11,9329.7 11479.79,9349.39 11487.67,9349.39 C62.2@11507.35,9369.07 ; R37.1@11499.48,7985.22 v1(11499.48,8026.55) ; R46.1@11505.38,7904.51 v1(11538.85,7904.51) ; v1(11507.35,9077.74) R60.2@11507.35,9109.23 ; R63.1@11660.89,9329.7 11660.89,9306.08 11712.08,9254.9 v1(11712.08,9128.92)
  Bottom Layer w7.87: C1.1@9487.67,6516.71 v1(9487.67,6554.11) ; v1(9609.71,7471.44) C11.2@9609.71,7495.06 ; C9.2@9613.65,8002.93 v1(9613.65,8030.49) ; v1(9881.37,7207.66) C10.2@9881.37,7239.15 ; C4.2@9881.37,8286.4 v1(9881.37,8317.89) ; C24.2@9971.92,7585.61 C24.2@9979.79,7585.61 ; C20.2@9975.85,7624.98 C20.2@9979.79,7624.98 ; C21.2@9975.85,7876.95 C21.2@9979.79,7876.95 ; C22.2@9975.85,7916.32 9995.54,7916.32 ; v1(10184.52,7601.36) 10200.26,7585.61 C26.2@10219.95,7585.61 ; 10200.26,7916.32 C28.2@10212.08,7916.32 ; v1(10314.44,7207.66) C5.2@10314.44,7239.15 ; C8.2@10314.44,8286.4 v1(10314.44,8317.89) ; v1(10542.78,7475.37) C7.2@10570.34,7475.37 ; C56.2@10578.22,7077.74 C56.2@10578.22,7081.67 ; C6.2@10609.71,7967.5 v1(10641.21,7967.5) ; C52.2@10629.4,8615.14 v1(10629.4,8650.57) ; v5(10786.88,7424.19) U8.K7@10802.63,7439.94 ; U8.D4@10897.11,7628.92 v5(10912.86,7613.17) ; U8.K2@10960.11,7439.94 v5(10975.85,7424.19) ; C97.2@11141.21,7810.02 11141.21,7786.4 v1(11164.83,7762.78) 11180.58,7778.52 C92.2@11180.58,7810.02 ; v5(11243.36,7233.59) U7.A1@11263.26,7250.96 ; v5(11259.32,7526.55) U7.J1@11263.26,7502.93 ; C79.2@11318.37,7778.52 11326.25,7778.52 v1(11345.93,7802.15) 11326.25,7817.89 C69.2@11318.37,7817.89 ; U7.A3@11326.25,7250.96 v3(11342,7235.22) ; U7.C3@11326.25,7313.96 v3(11342,7298.21) ; U7.E3@11326.25,7376.95 v3(11342,7361.2) ; C87.2@11349.87,8514.74 11330.19,8514.74 v1(11314.44,8530.49) 11330.19,8546.24 C77.2@11349.87,8546.24 ; v3(11436.48,7266.71) U7.B7@11452.23,7282.46 ; v3(11436.48,7329.7) U7.D7@11452.23,7345.45 ; C62.2@11507.35,9369.07 v1(11507.35,9400.57) ; C83.2@11554.59,7778.52 11562.47,7778.52 v1(11582.15,7798.21) 11562.47,7817.89 C73.2@11554.59,7817.89 ; C98.2@11641.21,7865.14 11641.21,7873.01 v1(11660.89,7892.7) 11680.58,7873.01 C91.2@11680.58,7865.14 ; U9.A1@11679.59,7251.96 11679.59,7250.96 11679.63,7250.77 v5(11684.52,7227.34) ; U9.J1@11680.58,7502.93 11680.58,7512.78 v5(11690.42,7522.62) ; U9.A3@11743.57,7250.96 v5(11759.32,7235.22) ; U9.C3@11743.57,7313.96 v3(11759.32,7298.21) ; U9.E3@11743.57,7376.95 v3(11759.32,7361.2) ; C82.2@11759.32,7778.52 11751.45,7778.52 v1(11731.76,7798.21) 11751.45,7817.89 C72.2@11759.32,7817.89 ; C99.2@11826.25,7900.57 11818.37,7900.57 v1(11798.69,7920.26) 11818.37,7939.94 C90.2@11826.25,7939.94 ; v5(11853.81,7266.71) U9.B7@11869.56,7282.46 ; v5(11853.81,7329.7) U9.D7@11869.56,7345.45 ; v1(11995.54,8054.11) C74.2@12019.16,8054.11 ; v1(11995.54,8439.94) C85.2@12019.16,8439.94
  Bottom Layer w15.75: v1(9404.99,8282.46) C128.2@9460.11,8282.46 ; v1(9404.99,8306.08) C128.2@9460.11,8306.08 ; v1(9404.99,8329.7) C128.2@9464.04,8329.7 ; v1(9404.99,8353.33) C128.2@9475.85,8353.33 ; v1(9684.52,8250.96) C30.2@9684.52,8313.96 ; v1(9708.14,8250.96) C30.2@9708.14,8310.02 C30.2@9708.14,8313.96 ; v1(9731.76,8250.96) C30.2@9731.76,8313.96 ; v1(9920.74,6691.91) HDR2.1@9948.3,6691.91 ; v1(9920.74,6715.53) HDR2.1@9944.36,6715.53 ; v1(9920.74,6739.15) HDR2.1@9948.3,6739.15 ; v1(9948.3,8632.85) v1(9948.3,8656.48) HDR1.1@9948.29,8711.59 ; v1(10046.72,8365.14) v1(10046.72,8483.25) ; C17.2@10097.9,8428.13 v1(10097.9,8483.25) ; C16.2@10149.08,7101.36 v1(10149.08,7160.41) ; C16.2@10176.64,7097.42 v1(10176.64,7160.41) ; v4(10834.12,8132.85) C129.2@10897.11,8132.85 ; v4(10834.12,8172.22) C129.2@10901.05,8172.22 ; v4(10881.37,9569.86) U11.1@10971.92,9569.86 v4(11062.47,9569.86) ; C88.2@11275.07,8121.04 v1(11275.07,8180.1) ; v1(11275.07,8219.47) C67.2@11275.07,8274.59 ; C88.2@11302.63,8121.04 v1(11302.63,8180.1) ; v1(11302.63,8219.47) C67.2@11302.63,8278.52 ; C88.2@11330.19,8124.98 v1(11330.19,8180.1) ; v1(11330.19,8219.47) C67.2@11330.19,8278.52 ; HDR2.98@11460.11,6971.44 v4(11530.97,6971.44) v4(11566.41,6971.44) ; HDR2.98@11460.11,7006.87 11491.6,7006.87 v4(11530.97,7006.87) v4(11566.41,7006.87) ; HDR1.98@11460.11,8967.5 v4(11527.04,8967.5) ; HDR1.98@11460.11,9002.93 v4(11527.04,9002.93) ; v1(11542.78,8380.89) C89.2@11593.96,8380.89 ; v1(11542.78,8416.32) C89.2@11597.9,8416.32 ; C89.2@11613.65,8376.95 v1(11668.77,8376.95) ; C89.2@11617.59,8412.38 v1(11668.77,8412.38) ; C66.2@11727.82,8396.63 v1(11727.82,8455.69) ; C66.2@11755.38,8396.63 v1(11755.38,8455.69) ; C66.2@11782.94,8400.57 v1(11782.94,8455.69) ; v4(11527.04,8967.5) v4(11562.47,8967.5) v4(11562.47,9002.93) v4(11527.04,9002.93) ; v4(11527.04,8967.5) v4(11527.04,9002.93)
GREEN0: HDR1.10 U1.D6 | length 27.8
  Top Layer w5: v1(9861.68,8065.93) U1.D6@9881.37,8046.24
GREEN1: HDR1.12 U1.C5 | length 27.8
  Top Layer w5: v1(9822.31,8105.3) U1.C5@9842,8085.61
HDRIVE: HDR1.18 U1.D4 | length 27.8
  Top Layer w5: v1(9782.94,8065.93) U1.D4@9802.63,8046.24
INT0: U1.B19 U5.155
INT1: U1.B20 U5.153
INT2: U1.C21 U5.152
INT3: U1.C22 U5.151
INT4: U1.D21 U5.150
IO0: HDR2.7 U1.W6 | length 27.8
  Top Layer w5: v1(9861.68,7436) U1.W6@9881.37,7455.69
IO1: HDR2.9 U1.Y6 | length 27.8
  Top Layer w5: v1(9861.68,7396.63) U1.Y6@9881.37,7416.32
IO2: HDR2.11 U1.W5 | length 27.8
  Top Layer w5: v1(9822.31,7436) U1.W5@9842,7455.69
IO3: HDR2.13 U1.Y5 | length 27.8
  Top Layer w5: v1(9822.31,7396.63) U1.Y5@9842,7416.32
IO4: HDR2.15 U1.W4 | length 27.8
  Top Layer w5: v1(9782.94,7436) U1.W4@9802.63,7455.69
IO5: HDR2.17 U1.Y4 | length 27.8
  Top Layer w5: v1(9782.94,7396.63) U1.Y4@9802.63,7416.32
IO6: HDR2.19 U1.U5 | length 27.8
  Top Layer w5: v1(9822.31,7514.74) U1.U5@9842,7534.43
IO7: HDR2.21 U1.Y3 | length 27.8
  Top Layer w5: v1(9743.57,7396.63) U1.Y3@9763.26,7416.32
IO8: HDR2.23 U1.V4 | length 27.8
  Top Layer w5: v1(9782.94,7475.37) U1.V4@9802.63,7495.06
IO9: HDR2.25 U1.W3 | length 27.8
  Top Layer w5: v1(9743.57,7436) U1.W3@9763.26,7455.69
IO10: HDR2.27 U1.U4 | length 27.8
  Top Layer w5: v1(9782.94,7514.74) U1.U4@9802.63,7534.43
IO11: HDR2.29 U1.V3 | length 27.8
  Top Layer w5: v1(9743.57,7475.37) U1.V3@9763.26,7495.06
IO12: HDR2.31 U1.U3 | length 27.8
  Top Layer w5: v1(9743.57,7514.74) U1.U3@9763.26,7534.43
IO13: HDR2.33 U1.T4 | length 27.8
  Top Layer w5: v1(9782.94,7554.11) U1.T4@9802.63,7573.8
IO14: HDR2.35 U1.T3 | length 27.8
  Top Layer w5: v1(9743.57,7554.11) U1.T3@9763.26,7573.8
IO15: HDR2.37 U1.R4 | length 27.8
  Top Layer w5: v1(9782.94,7593.48) U1.R4@9802.63,7613.17
IO16: HDR2.39 U1.P4 | length 27.8
  Top Layer w5: v1(9782.94,7632.85) U1.P4@9802.63,7652.54
IO17: HDR2.41 U1.N4 | length 27.8
  Top Layer w5: v1(9782.94,7672.22) U1.N4@9802.63,7691.91
IO18: HDR2.43 U1.N3 | length 27.8
  Top Layer w5: v1(9743.57,7672.22) U1.N3@9763.26,7691.91
IO19: HDR2.45 U1.M4 | length 27.8
  Top Layer w5: v1(9782.94,7711.59) U1.M4@9802.63,7731.28
IO20: HDR2.47 U1.M3 | length 27.8
  Top Layer w5: v1(9743.57,7711.59) U1.M3@9763.26,7731.28
IO21: HDR2.49 U1.L4 | length 27.8
  Top Layer w5: v1(9782.94,7790.34) U1.L4@9802.63,7770.65
IO22: HDR2.51 U1.L3 | length 27.8
  Top Layer w5: v1(9743.57,7790.34) U1.L3@9763.26,7770.65
IO23: HDR2.53 U1.E5 | length 27.8
  Top Layer w5: v1(9822.31,8026.56) U1.E5@9842,8006.87
IO24: HDR2.55 U1.F5 | length 27.8
  Top Layer w5: v1(9822.31,7987.19) U1.F5@9842,7967.5
IO25: HDR2.57 U1.F6 | length 27.8
  Top Layer w5: v1(9861.68,7987.19) U1.F6@9881.37,7967.5
IO26: HDR2.59 U1.G5 | length 27.8
  Top Layer w5: v1(9822.31,7947.82) U1.G5@9842,7928.13
IO27: HDR2.61 U1.J5 | length 27.8
  Top Layer w5: v1(9822.31,7869.08) U1.J5@9842,7849.39
IO28: HDR2.63 U1.H5 | length 27.8
  Top Layer w5: v1(9822.31,7908.45) U1.H5@9842,7888.76
IO29: HDR2.65 U1.K5 | length 27.8
  Top Layer w5: v1(9822.31,7829.71) U1.K5@9842,7810.02
IO30: HDR2.67 U1.M1
IO31: HDR2.69 U1.M5 | length 27.8
  Top Layer w5: v1(9822.31,7711.59) U1.M5@9842,7731.28
IO32: HDR2.71 U1.L5 | length 27.8
  Top Layer w5: v1(9822.31,7790.34) U1.L5@9842,7770.65
IO33: HDR2.73 U1.P5 | length 27.8
  Top Layer w5: v1(9822.31,7632.85) U1.P5@9842,7652.54
IO34: HDR2.75 U1.N5 | length 27.8
  Top Layer w5: v1(9822.31,7672.22) U1.N5@9842,7691.91
IO35: HDR2.77 U1.J6 | length 27.8
  Top Layer w5: v1(9861.68,7869.08) U1.J6@9881.37,7849.39
JIOA0: HDR1.3 U1.D9 | length 27.8
  Top Layer w5: v1(9979.79,8065.93) U1.D9@9999.48,8046.24
JIOA1: HDR1.5 U1.D10 | length 27.8
  Top Layer w5: v1(10019.16,8065.93) U1.D10@10038.85,8046.24
JIOA2: HDR1.7 U1.C10 | length 27.8
  Top Layer w5: v1(10019.16,8105.3) U1.C10@10038.85,8085.61
JIOA3: HDR1.9 U1.D11 | length 27.8
  Top Layer w5: v1(10058.53,8065.93) U1.D11@10078.22,8046.24
JIOB0: HDR1.83 U1.J18 | length 27.8
  Top Layer w5: U1.J18@10353.81,7849.39 v1(10373.49,7869.08)
JIOB1: HDR1.85 U1.K18 | length 27.8
  Top Layer w5: U1.K18@10353.81,7810.02 v1(10373.49,7829.71)
JIOB2: HDR1.87 U1.E19 | length 27.8
  Top Layer w5: U1.E19@10393.18,8006.87 v1(10412.86,8026.56)
JIOB3: HDR1.89 U1.F20 | length 27.8
  Top Layer w5: U1.F20@10432.55,7967.5 v1(10452.23,7987.19)
KBCLOCK: HDR1.22 U1.D3 | length 27.8
  Top Layer w5: v1(9743.57,8065.93) U1.D3@9763.26,8046.24
KBDATA: HDR1.24 U1.E4 | length 27.8
  Top Layer w5: v1(9782.94,8026.56) U1.E4@9802.63,8006.87
LCD_BCKL: HDR2.22 U1.W13 | length 27.8
  Top Layer w5: U1.W13@10156.96,7455.69 v1(10176.64,7436)
LCD_E: HDR2.26 U1.W15 | length 27.8
  Top Layer w5: U1.W15@10235.7,7455.69 v1(10255.38,7436)
LED0: HDR2.60 U1.R19 | length 67.2
  Top Layer w5: U1.R19@10393.18,7613.17 v1(10412.86,7593.48)
  Bottom Layer w5: HDR2.60@10861.68,6979.31 10861.68,7018.68
LED1: HDR2.62 U1.P19 | length 27.8
  Top Layer w5: U1.P19@10393.18,7652.54 v1(10412.86,7632.85)
LED2: HDR2.64 U1.N19 | length 27.8
  Top Layer w5: U1.N19@10393.18,7691.91 v1(10412.86,7672.22)
LED3: HDR2.66 U1.N20 | length 27.8
  Top Layer w5: U1.N20@10432.55,7691.91 v1(10452.23,7672.22)
LED4: HDR2.68 U1.M19 | length 27.8
  Top Layer w5: U1.M19@10393.18,7731.28 v1(10412.86,7711.59)
LED5: HDR2.70 U1.M20 | length 27.8
  Top Layer w5: U1.M20@10432.55,7731.28 v1(10452.23,7711.59)
LED6: HDR2.72 U1.L19 | length 27.8
  Top Layer w5: U1.L19@10393.18,7770.65 v1(10412.86,7790.34)
LED7: HDR2.74 U1.L20 | length 27.8
  Top Layer w5: U1.L20@10432.55,7770.65 v1(10452.23,7790.34)
MOUSECLOCK: HDR1.26 U1.E3 | length 27.8
  Top Layer w5: v1(9743.57,8026.56) U1.E3@9763.26,8006.87
MOUSEDATA: HDR1.28 U1.F4 | length 27.8
  Top Layer w5: v1(9782.94,7987.19) U1.F4@9802.63,7967.5
NBLE0: U1.H22 U5.37
NBLE1: U1.H21 U5.36
NBLE2: U1.G22 U5.35
NBLE3: U1.G21 U5.34
NCS0: U1.L21 U5.48
NCS1: U1.L22 U5.47
NCS2: U1.M21 U5.46
NCS3: U1.K22 U5.44
NCS4: U1.K21 U5.43
NCS5: U1.J22 U5.42
NDACK0: U1.N18 U5.147 | length 27.8
  Top Layer w5: U1.N18@10353.81,7691.91 v1(10373.49,7672.22)
NetC59_1: C59.1 R36.1 R37.2 | length 448
  Bottom Layer w5: R36.1@11349.87,7920.26 11365.62,7920.26 11406.39,7961.03 11406.39,7966.93 R37.2@11418.77,7979.31 11458.14,7939.94 11672.71,7939.94 11716.01,7896.63 C59.1@11735.7,7896.63
NetC60_1: C60.1 R44.1 R46.2 | length 458.3
  Bottom Layer w5: R44.1@11349.87,7873.01 R46.2@11428.61,7873.01 ; R46.2@11414.83,7888.76 11456.01,7929.94 11663.02,7929.94 11704.2,7888.76 11704.2,7869.07 11716.01,7857.26 C60.1@11735.7,7857.26
NetC61_1: C61.1 C63.1 C64.1 C65.1 D1.3 R59.2 U5.91 | length 864.6
  Top Layer w5: U5.91@11944.36,7857.26 11979.79,7857.26 11991.6,7845.45 v1(12007.35,7845.45)
  Bottom Layer w7.87: R59.2@11497.51,8227.34 11509.32,8215.53 D1.3@11509.32,8101.36 D1.3@11509.32,8099.39 ; D1.3@11508.33,8100.37 D1.3@11509.32,8099.39 ; C61.1@12003.41,7873.01 12007.35,7869.07 v1(12007.35,7845.45) ; C63.1@12007.35,7813.96 v1(12007.35,7845.45) ; D1.3@11509.32,8099.39 C65.1@11605.78,8002.93 C64.1@11755.38,8002.93 11842,8002.93 11991.6,7853.33 v1(12007.35,7845.45)
NetC61_2: C61.2 C63.2 C64.2 C65.2 U5.92 | length 706.5
  Top Layer w5: U5.92@11944.36,7873.01 11987.67,7873.01 11995.54,7865.14 12023.1,7865.14 v1(12042.78,7845.45)
  Bottom Layer w7.87: C65.2@11629.4,8121.04 C64.2@11755.38,8121.04 11767.19,8121.04 11790.82,8097.42 11790.82,8073.8 11936.48,7928.13 12007.35,7928.13 12042.78,7892.7 v1(12042.78,7845.45) C63.2@12042.78,7817.89
NetLED1_1: LED1.1 R5.2 | length 333.5
  Top Layer w7.87: LED1.1@11273.1,6546.24 11273.1,6497.03 11306.56,6463.56 11389.24,6463.56 11471.92,6546.24 R5.2@11509.32,6546.24
NetLED2_1: LED2.1 R16.1 | length 215.7
  Top Layer w7.87: R16.1@9899.08,6601.36 9971.92,6601.36 10027.04,6546.24 LED2.1@10092,6546.24
NetLED2_2: LED2.2 U2.4 | length 703.1
  Top Layer w7.87: U2.4@9521.13,6557.07 9571.33,6557.07 9649.08,6479.31 10121.52,6479.31 10149.08,6506.87 LED2.2@10149.08,6538.37
NetLED3_1: LED3.1 R58.2 | length 681.6
  Top Layer w7.87: R58.2@11298.69,9341.52 R58.2@11304.59,9341.52 v1(11306.56,9388.76) ; v1(11806.56,9589.55) LED3.1@11851.84,9589.55
  Mid-Layer 3 w5: v1(11306.56,9388.76) 11479.79,9561.99 11779,9561.99 v1(11806.56,9589.55)
NetP1_1: P1.1 P5.2 R58.1 R60.1 U6.1 | length 1745.1
  Top Layer w5: P1.1@10487.67,9955.69 10552.28,9891.07 10581.85,9891.07 P5.2@10630.02,9842.91 ; v1(11184.52,9341.52) 11227.82,9341.52 R58.1@11228.81,9340.53 ; U6.1@11507.35,9130.89 v1(11507.35,9180.1)
  Mid-Layer 1 w5: v1(11184.52,9341.52) 11345.93,9341.52 v1(11507.35,9180.1)
  Mid-Layer 2 w5: P1.1@10487.67,9955.69 10551.61,9891.74 10755.97,9891.74 10821.9,9825.82 10821.9,9712.01 11054.59,9479.31 11086.09,9479.31 11184.52,9380.89 v1(11184.52,9341.52)
  Bottom Layer w5: R60.1@11507.35,9148.6 v1(11507.35,9180.1)
NetP2_17: P2.17 R66.2 | length 774.4
  Mid-Layer 2 w5: P2.17@11003.81,9954.51 11050.66,9907.66 11050.66,9810.02 v1(11460.11,9400.57)
  Bottom Layer w5: R66.2@11460.11,9369.07 v1(11460.11,9400.57)
NetP2_19: P2.19 R67.2 | length 819.4
  Mid-Layer 2 w5: P2.19@10903.81,9954.51 10952.23,9906.08 10952.23,9821.83 11373.49,9400.57 v1(11412.86,9400.57)
  Bottom Layer w5: R67.2@11412.86,9369.07 v1(11412.86,9400.57)
NetR21_1: R21.1 U5.104 | length 84.6
  Top Layer w5: v3(11897.11,8061.99) U5.104@11944.36,8061.99
  Bottom Layer w5: v3(11897.11,8061.99) 11920.74,8085.61 R21.1@11924.67,8085.61
NetR22_1: R22.1 U5.99 | length 303.9
  Top Layer w5: v3(11834.12,8097.42) 11861.68,8069.86 11861.68,8010.81 11889.24,7983.25 U5.99@11944.36,7983.25
  Bottom Layer w5: v3(11834.12,8097.42) 11885.3,8046.24 R22.1@11924.67,8046.24
NetR23_1: R23.1 U5.98 | length 310.1
  Top Layer w5: v3(11834.12,8073.8) 11834.12,8018.68 11885.3,7967.5 U5.98@11944.36,7967.5
  Bottom Layer w5: v3(11834.12,8073.8) 11869.56,8038.37 11869.56,8030.49 11885.3,8014.74 R23.1@11928.61,8014.74